# Altium PCB PCBejercicio.PcbDoc
Units mm, origin at the board's own origin, x right, y up, seen from the top; angles counter-clockwise.
Board outline 62.9 x 62.32 mm, 2 copper layers (Top Layer, Bottom Layer); 22 components, 36 nets, 127 pads, 0 vias.
Unrouted connection lines stored in the file: 82.
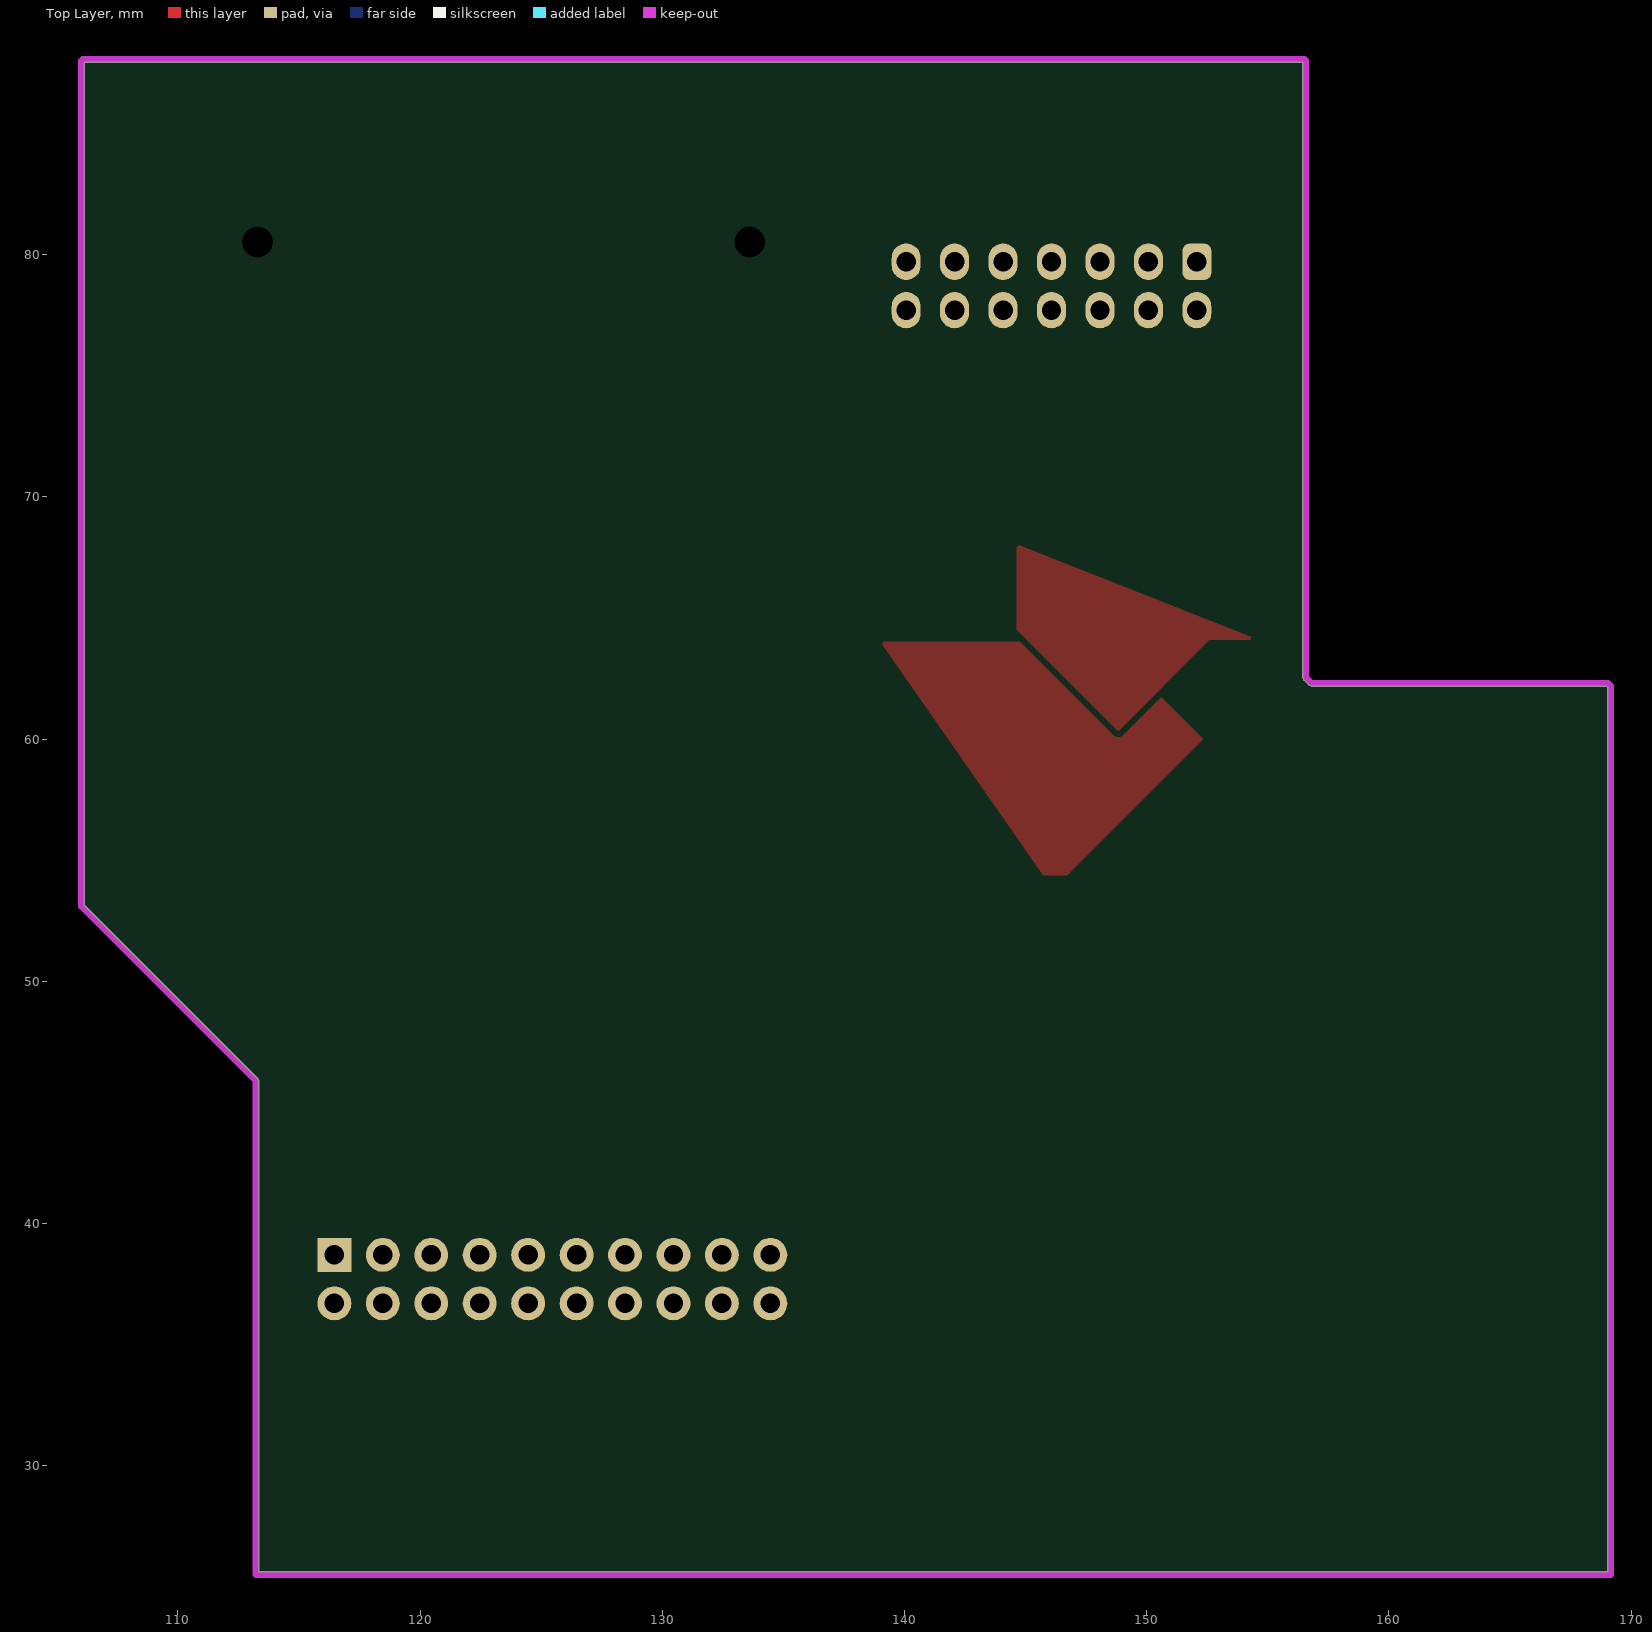
[diagram p0: Top Layer view]
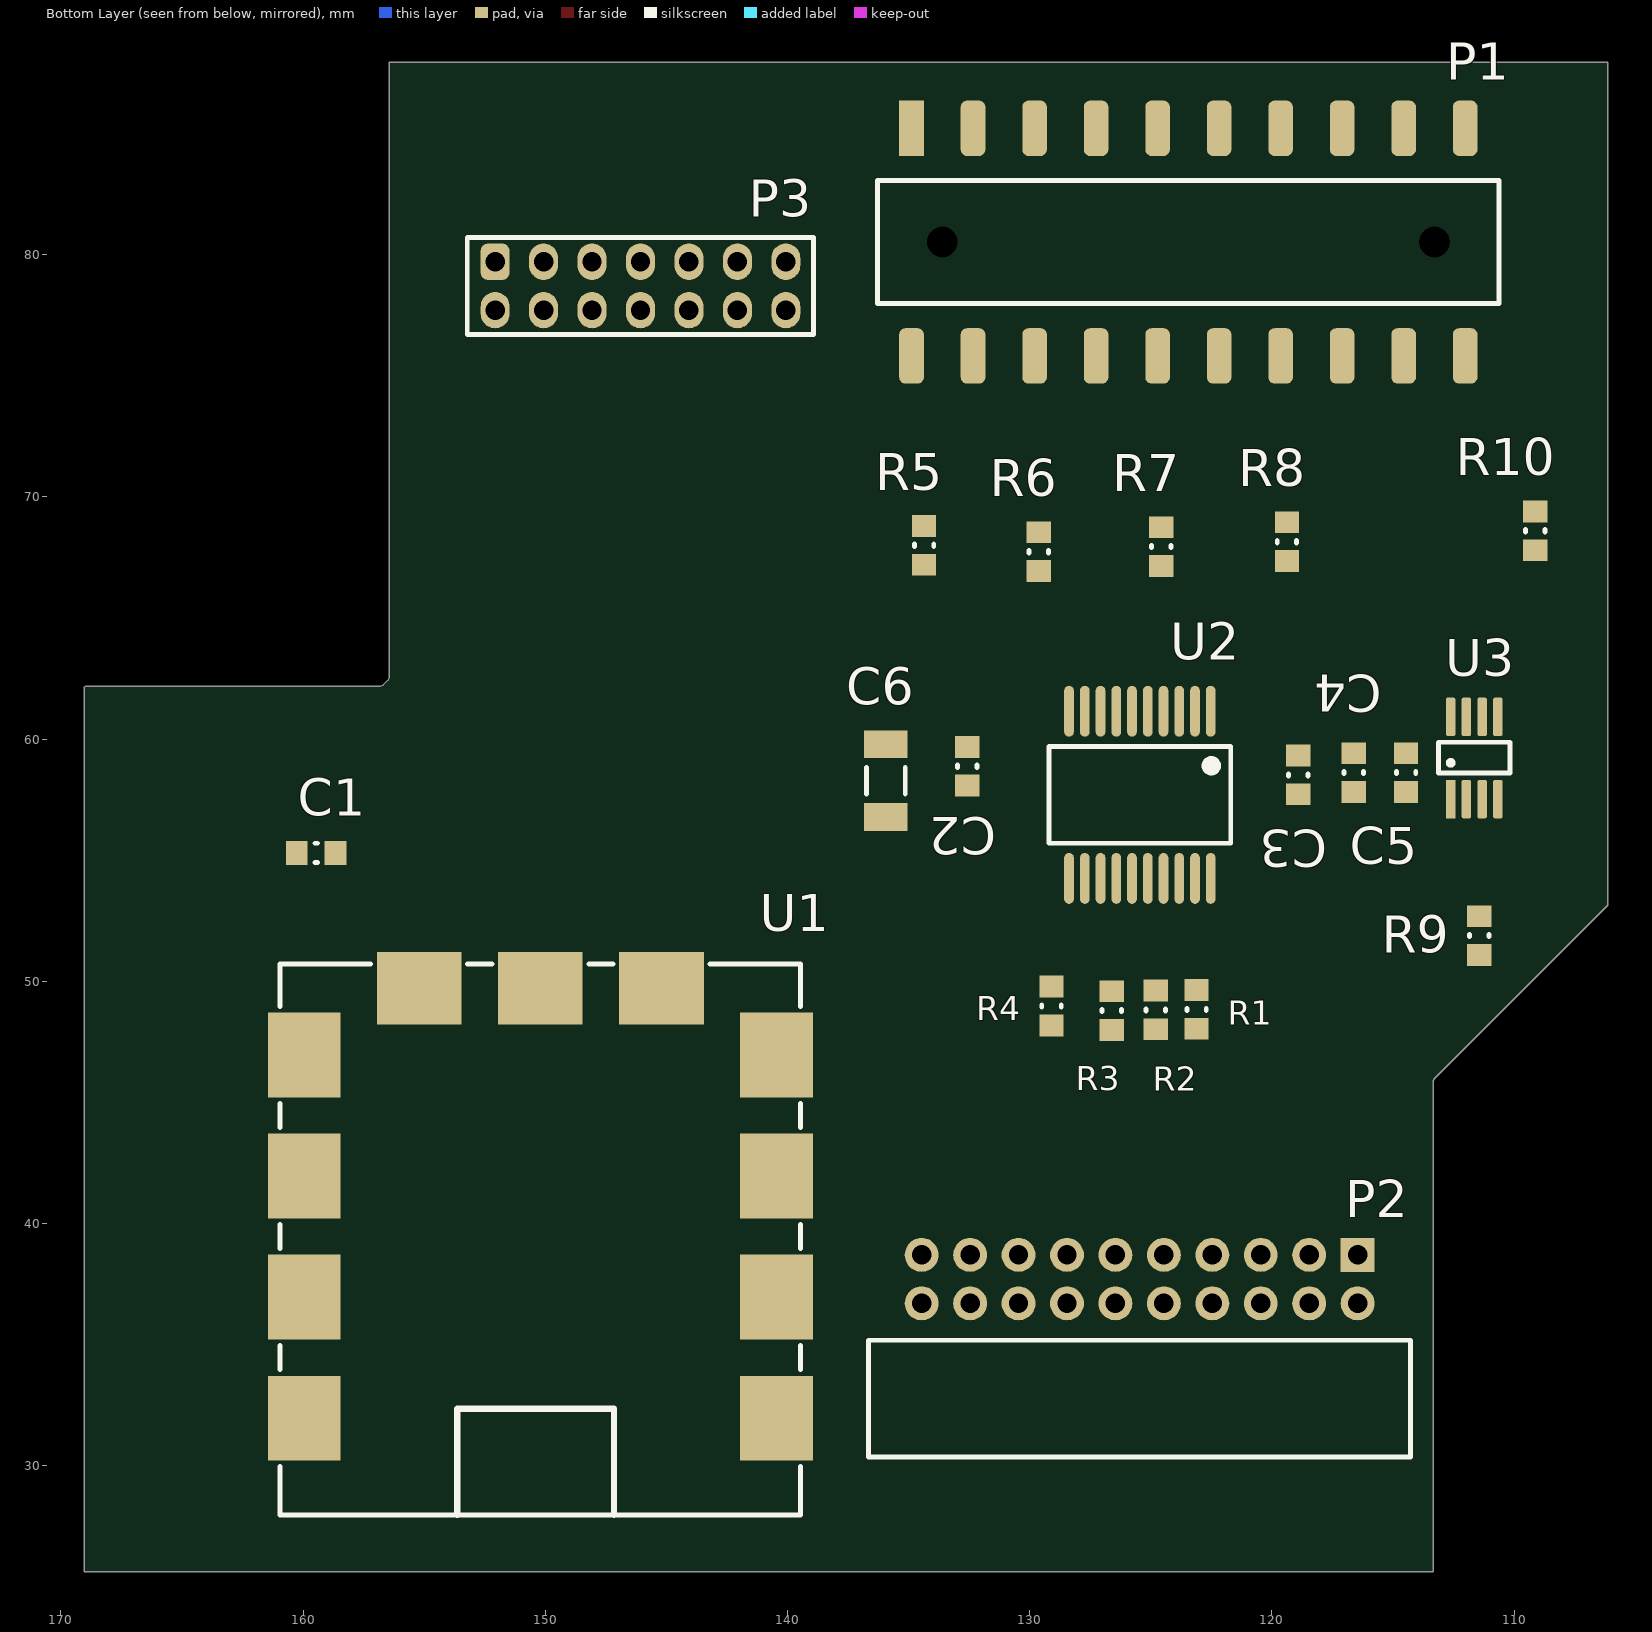
[diagram p1: Bottom Layer view, seen from below]

## Layer stack, top to bottom
Top Solder: solder mask 0.0102, Solder Resist, Dk 3.5
Top Layer: signal copper 0.0356
Dielectric 1: dielectric 0.32, FR-4, Dk 4.8
Bottom Layer: signal copper 0.0356
Bottom Solder: solder mask 0.0102, Solder Resist, Dk 3.5

## Board outline
106.137,53.143 113.3,45.98 113.337,45.89 113.337,25.627 168.99,25.627 169.033,25.62 169.033,62.147 168.987,62.193 156.79,62.193 156.7,62.23 156.49,62.44 156.453,62.53 156.453,87.943 106.137,87.943

## Design rules (kind name [scope] priority, off if disabled: settings)
Clearance [All] p1: gap=0.254 ignorepadtopadclearanceinfootprint=FALSE except(0: Arc-Hole Track-Hole SMDPad-Hole THPad-Hole Via-Hole Fill-Hole Poly-Hole Region-Hole Text-Hole)
MinimumSolderMaskSliver [All] p1: minsoldermaskwidth=0.08
PolygonConnect [All] p1: connectstyle=Relief reliefconductorwidth=0.254 reliefentries=4 polygonreliefangle="90 Angle" airgapwidth=0.254
RoutingVias [All] p1: holewidth=0.711 width=1.27 viastyle="Through Hole" minholewidth=0.711 minwidth=1.27 maxholewidth=0.711 maxwidth=1.27
SolderMaskExpansion [All] p1: expansion=0.102 istentingtop=FALSE
Width [All] p1: maxlimit=0.254 minlimit=0.254 preferedwidth=0.254
29 further rules are at their usual default settings.

## Components (designator, comment, footprint, x,y, rotation, side; value= is the part's Value field where it differs from the comment)
C1 "Cap" CAPC0603(1608)100_N 159.46,55.3 r0 bottom value="100 nF"
C2 "Cap" CAPC0603(1608)100_N 132.58,58.88 r90 bottom value="1 nF"
C3 "Cap" CAPC0603(1608)100_N 118.91,58.52 r90 bottom value="100 nF"
C4 "Cap" CAPC0603(1608)100_N 116.62,58.62 r90 bottom value="1 nF"
C5 "Cap" CAPC0603(1608)100_N 114.46,58.62 r90 bottom value="100 nF"
C6 "Cap" CAPC1206(3216)100_N 135.94,58.29 r90 bottom value="10 uF"
P1 "SSM-110-x-DV-LC" SSM-110-X-DV-LC 134.88,85.22 r90 bottom
P2 "LTMM-110-02-x-D-RA" LTMM-110-02-X-D-RA 116.461,38.703 r270 bottom
P3 "PTF-107-xx-L-D" PTF-107-XX-L-D 152.07,79.71 r90 bottom
R1 "Res3" RESC0603(1608)_N 123.11,48.84 r270 bottom value=100R
R2 "Res3" RESC0603(1608)_N 124.8,48.82 r270 bottom value=100R
R3 "Res3" RESC0603(1608)_N 126.61,48.79 r270 bottom value=100R
R4 "Res3" RESC0603(1608)_N 129.1,48.98 r270 bottom value=100R
R5 "Res3" RESC0603(1608)_N 134.36,68 r90 bottom value=100R
R6 "Res3" RESC0603(1608)_N 129.63,67.74 r270 bottom value=100R
R7 "Res3" RESC0603(1608)_N 124.57,67.95 r270 bottom value=100R
R8 "Res3" RESC0603(1608)_N 119.38,68.15 r270 bottom value=100R
R9 "Res3" RESC0603(1608)_N 111.44,51.89 r270 bottom value=100R
R10 "Res3" RESC0603(1608)_N 109.13,68.6 r90 bottom value=100R
U1 "JTAG-SMT2" JTAG-SMT2 150.207,39.462 r0 bottom
U2 "SN74LVC244ADB" DB020_N 125.451,57.7 r270 bottom
U3 "SN74LVC2G241DCTR" DCT08_N 112.62,57.52 r90 bottom

## Footprints (in the part's own frame and the unit in brackets; to place one, negate y for a bottom-side part, rotate by r counter-clockwise, add the part's x,y. Pads: shape width x height; smd on the part's side, far side on the other; paste and mask are expansions set on the pad)
CAPC0603(1608)100_N [mm] "Chip Capacitor, Body 1.6x0.8mm, Height 1.0mm, IPC Medium Density"
  rect 0.9x1 smd: 1(-0.8,0) 2(0.8,0)
  silkscreen extent -0.05,-0.4 0.05,0.4, body extent -0.87,-0.48 0.88,0.47, height 1
CAPC1206(3216)100_N [mm] "Chip Capacitor, Body 3.2x1.6mm, Height 1mm, IPC Medium Density"
  rect 1.15x1.8 smd: 1(-1.5,0) 2(1.5,0)
  silkscreen extent -0.55,-0.8 0.55,0.8, body extent -1.7,-0.9 1.7,0.9, height 1
DB020_N [mm] "SOP, 20-Leads, Body 7.2x5.3mm, Pitch 0.65mm, IPC Medium Density"
  oval 2.1x0.4 smd: 1(-3.45,2.925) 2(-3.45,2.275) 3(-3.45,1.625) 4(-3.45,0.975) 5(-3.45,0.325) 6(-3.45,-0.325) 7(-3.45,-0.975) 8(-3.45,-1.625) 9(-3.45,-2.275) 10(-3.45,-2.925) 11(3.45,-2.925) 12(3.45,-2.275) 13(3.45,-1.625) 14(3.45,-0.975) 15(3.45,-0.325) 16(3.45,0.325) 17(3.45,0.975) 18(3.45,1.625) 19(3.45,2.275) 20(3.45,2.925)
  silkscreen extent -2,-3.75 2,3.75, body extent -2.7,-3.75 2.7,3.75, height 2
DCT08_N [mm]
  rect 1.6x0.4 smd: 1(0,0)
  rrect50% 1.6x0.4 smd: 2(0,-0.65) 3(0,-1.3) 4(0,-1.95) 5(3.4,-1.95) 6(3.4,-1.3) 7(3.4,-0.65) 8(3.4,0)
  silkscreen extent 1.07,-2.45 2.35,0.5
JTAG-SMT2 [mm]
  rect 3x3.5 smd: 1(-9.75,7.5) 2(-9.75,2.5) 3(-9.75,-2.5) 4(-9.75,-7.5) 8(9.75,-7.5) 9(9.75,-2.5) 10(9.75,2.5) 11(9.75,7.5)
  rect 3.5x3 smd: 5(-5,-10.25) 6(0,-10.25) 7(5,-10.25)
  silkscreen extent -10.75,-11.25 10.75,11.5
LTMM-110-02-X-D-RA [mm]
  rect 1.4x1.4 hole 0.8: 1(0,0)
  round 1.4 hole 0.8: 2(2,0) 3(0,-2) 4(2,-2) 5(0,-4) 6(2,-4) 7(0,-6) 8(2,-6) 9(0,-8) 10(2,-8) 11(0,-10) 12(2,-10) 13(0,-12) 14(2,-12) 15(0,-14) 16(2,-14) 17(0,-16) 18(2,-16) 19(0,-18) 20(2,-18)
  silkscreen extent 3.52,-20.19 8.35,2.19
PTF-107-XX-L-D [mm]
  rrect50% 1.5x1.2 hole 0.8: 1(0,0)
  oval 1.5x1.2 hole 0.8: 2(-2,0) 3(0,-2) 4(-2,-2) 5(0,-4) 6(-2,-4) 7(0,-6) 8(-2,-6) 9(0,-8) 10(-2,-8) 11(0,-10) 12(-2,-10) 13(0,-12) 14(-2,-12)
  silkscreen extent -3,-13.15 1,1.15
RESC0603(1608)_N [mm] "Chip Resistor, Body 1.6x0.8mm, IPC Medium Density"
  rect 0.9x1 smd: 1(-0.8,0) 2(0.8,0)
  silkscreen extent -0.05,-0.4 0.05,0.4, body extent -0.85,-0.47 0.85,0.47, height 0.6
SSM-110-X-DV-LC [mil]
  rect 90x40 smd: 1(0,0)
  rrect50% 90x40 smd: 2(-370,0) 3(0,-100) 4(-370,-100) 5(0,-200) 6(-370,-200) 7(0,-300) 8(-370,-300) 9(0,-400) 10(-370,-400) 11(0,-500) 12(-370,-500) 13(0,-600) 14(-370,-600) 15(0,-700) 16(-370,-700) 17(0,-800) 18(-370,-800) 19(0,-900) 20(-370,-900)
  round 0 hole 50 unplated: LC1(-185,-50) LC2(-185,-850)
  silkscreen extent -285,-955 -85,55

## Part data
C1 C2 C3 C4 C5 C6: "Capacitor", LatestRevisionDate=17-Jul-2002, LatestRevisionNote="Re-released for DXP Platform.", PackageDescription="Radial Cap, Thru-Hole; 2 Leads; 0.3 in Pin Spacing", PackageReference=RAD-0.3, Published=8-Jun-2000, Publisher="Altium Limited"
P1: "Samtec SSM-110-x-DV-LC", LatestRevisionDate=17-Jul-2002, LatestRevisionNote="Re-released for DXP Platform.", Publisher="Altium Limited"
P2: "Samtec LTMM-110-02-x-D-RA", LatestRevisionDate=17-Jul-2002, LatestRevisionNote="Re-released for DXP Platform.", Publisher="Altium Limited"
P3: "Samtec PTF-107-xx-L-D", LatestRevisionDate=17-Jul-2002, LatestRevisionNote="Re-released for DXP Platform.", Publisher="Altium Limited"
R1 R2 R3 R4 R5 R6 R7 R8 R9 R10: "Resistor", LatestRevisionDate=29-May-2009, LatestRevisionNote="IPC-7351 Footprint Added.", PackageDescription="Chip Resistor", PackageReference=J1-0603, Published=8-Jun-2000, Publisher="Altium Limited"
U1: library part JTAG_SMT2
U2: "Octal Buffer/Driver with 3-State Outputs", Code_IPC=SOP65P780-20, Code_JEDEC=MO-150-AE, ComponentLink1Description="Manufacturer Link", ComponentLink1URL=http://www.ti.com/, ComponentLink2Description=Datasheet, ComponentLink2URL=http://www-s.ti.com/sc/ds/sn74lvc244a.pdf, DatasheetVersion=Apr-1999, LatestRevisionDate=16-Oct-2006, LatestRevisionNote="IPC-7351 Footprint Added.", PackageDescription="20-Pin Plastic Small Outline Package 0.65 mm Pitch", PackageReference=DB020, PackageVersion=May-1999, Published=8-Jun-2000, Publisher="Altium Limited"
U3: "Quadruple Bus Buffer Gate with 3- State Outputs", Code_JEDEC=MO-092-AB, ComponentLink1Description="Manufacturer Link", ComponentLink1URL=http://www.ti.com/, ComponentLink2Description=Datasheet, ComponentLink2URL=http://www-s.ti.com/sc/ds/sn54abt125.pdf, DatasheetVersion=May-1997, LatestRevisionDate=06-Jun-2005, LatestRevisionNote="Stylized 3D Model Added.", PackageDescription="DFP; 14 Leads; Body 9.9 x 6.6 mm (LxW max); Pitch 1.27 mm", PackageReference=W014, PackageVersion=Jan-1995, Published=8-Jun-2000, Publisher="Altium Limited"

## Nets (pads, with @x,y where several pads share a name; then routed paths per layer and width w, separated by ;. In a path a pad name is that pad's centre, name@x,y a point inside that pad or via, vN(x,y) a via of type N, cw(c..) or ccw(c..) an arc to the next point about the centre after c; other vN are vias at no path point)
GND: C1.1 C2.1 C3.1 C4.1 C5.1 C6.1 P1.3 P1.4 P1.7 P1.8 P1.11 P1.12 P1.15 P1.16 P2.2 P2.4 P2.6 P2.8 P2.10 P2.12 P2.14 P2.16 P2.18 P2.20 P3.1 P3.3 P3.5 P3.7 P3.9 P3.11 P3.13 U1.1 U1.10 U2.1 U2.10 U2.19 U3.1 U3.4 U3.7
IN0: P2.3 U3.5
IN1: P2.7 U2.17
IN2: P2.11 U2.15
IN3: P2.15 U2.13
IN4: P2.19 U2.11
MICTOR01: P1.19 U3.2
MICTOR02: P1.17 R10.2
MICTOR03: P1.13 U2.2
MICTOR04: P1.9 U2.4
MICTOR05: P1.5 U2.6
MICTOR06: P1.1 U2.8
MICTOR07: P1.2 R5.2
MICTOR08: P1.6 R6.2
MICTOR09: P1.14 R8.2
MICTOR10: P1.10 R7.2
NetR1_1: R1.1 U2.18
NetR2_1: R2.1 U2.16
NetR3_1: R3.1 U2.14
NetR4_1: R4.1 U2.12
NetR5_1: R5.1 U2.9
NetR6_1: R6.1 U2.7
NetR7_1: R7.1 U2.5
NetR8_1: R8.1 U2.3
NetR9_1: R9.1 U3.6
NetR10_1: R10.1 U3.3
OUT0: P2.1 R9.2
OUT1: P2.5 R1.2
OUT2: P2.9 R2.2
OUT3: P2.13 R3.2
OUT4: P2.17 R4.2
TCK: P3.6 U1.2
TDI: P3.10 U1.8
TDO: P3.8 U1.3
TMS: P3.4 U1.4
VCC: C1.2 C2.2 C3.2 C4.2 C5.2 C6.2 P3.2 U1.9 U1.11 U2.20 U3.8
pads on no net: P1.18 P1.20 P1.LC1 P1.LC2 P3.12 P3.14 U1.5 U1.6 U1.7

## Polygon pours and split planes (outlines as drawn)
IN0 on Top Layer "IN0_L01_P000" (solid, pour order 0): 144.63,68.04 144.63,64.52 148.82,60.33 152.59,64.1 154.61,64.1
GND on Top Layer "GND_L01_P001" (solid, pour order 1): 139.01,64.02 148.31,64.02 152.34,59.99 146.72,54.37 145.72,54.37

## Keep-outs
Top Layer:
  lines w0.254: 106.01,53.09 113.21,45.89 113.21,25.51 113.22,25.5 169.16,25.5 169.16,62.2 169.04,62.32 156.79,62.32 156.58,62.53 156.58,88.01 156.52,88.07 106.07,88.07 106.01,88.01 106.01,53.09

## Silkscreen, mask and mechanical layers (free items; w line width, h text height)
Mechanical 15:
  lines w0.254: 134.86,85.27 134.86,88.71 ; 134.888,85.246 134.888,88.686 ; 135.12,84.692 138.56,84.692 ; 135.21,77.614 144.07,77.71 ; 140.052,79.44 140.052,82.88